# Altium PCB main board.PcbDoc
Units mil, origin at the board's own origin, x right, y up, seen from the top; angles counter-clockwise.
Board outline 2850 x 2755 mil, 2 copper layers (Top Layer, Bottom Layer); 28 components, 37 nets, 131 pads, 10 vias.
Unrouted connection lines stored in the file: 1.
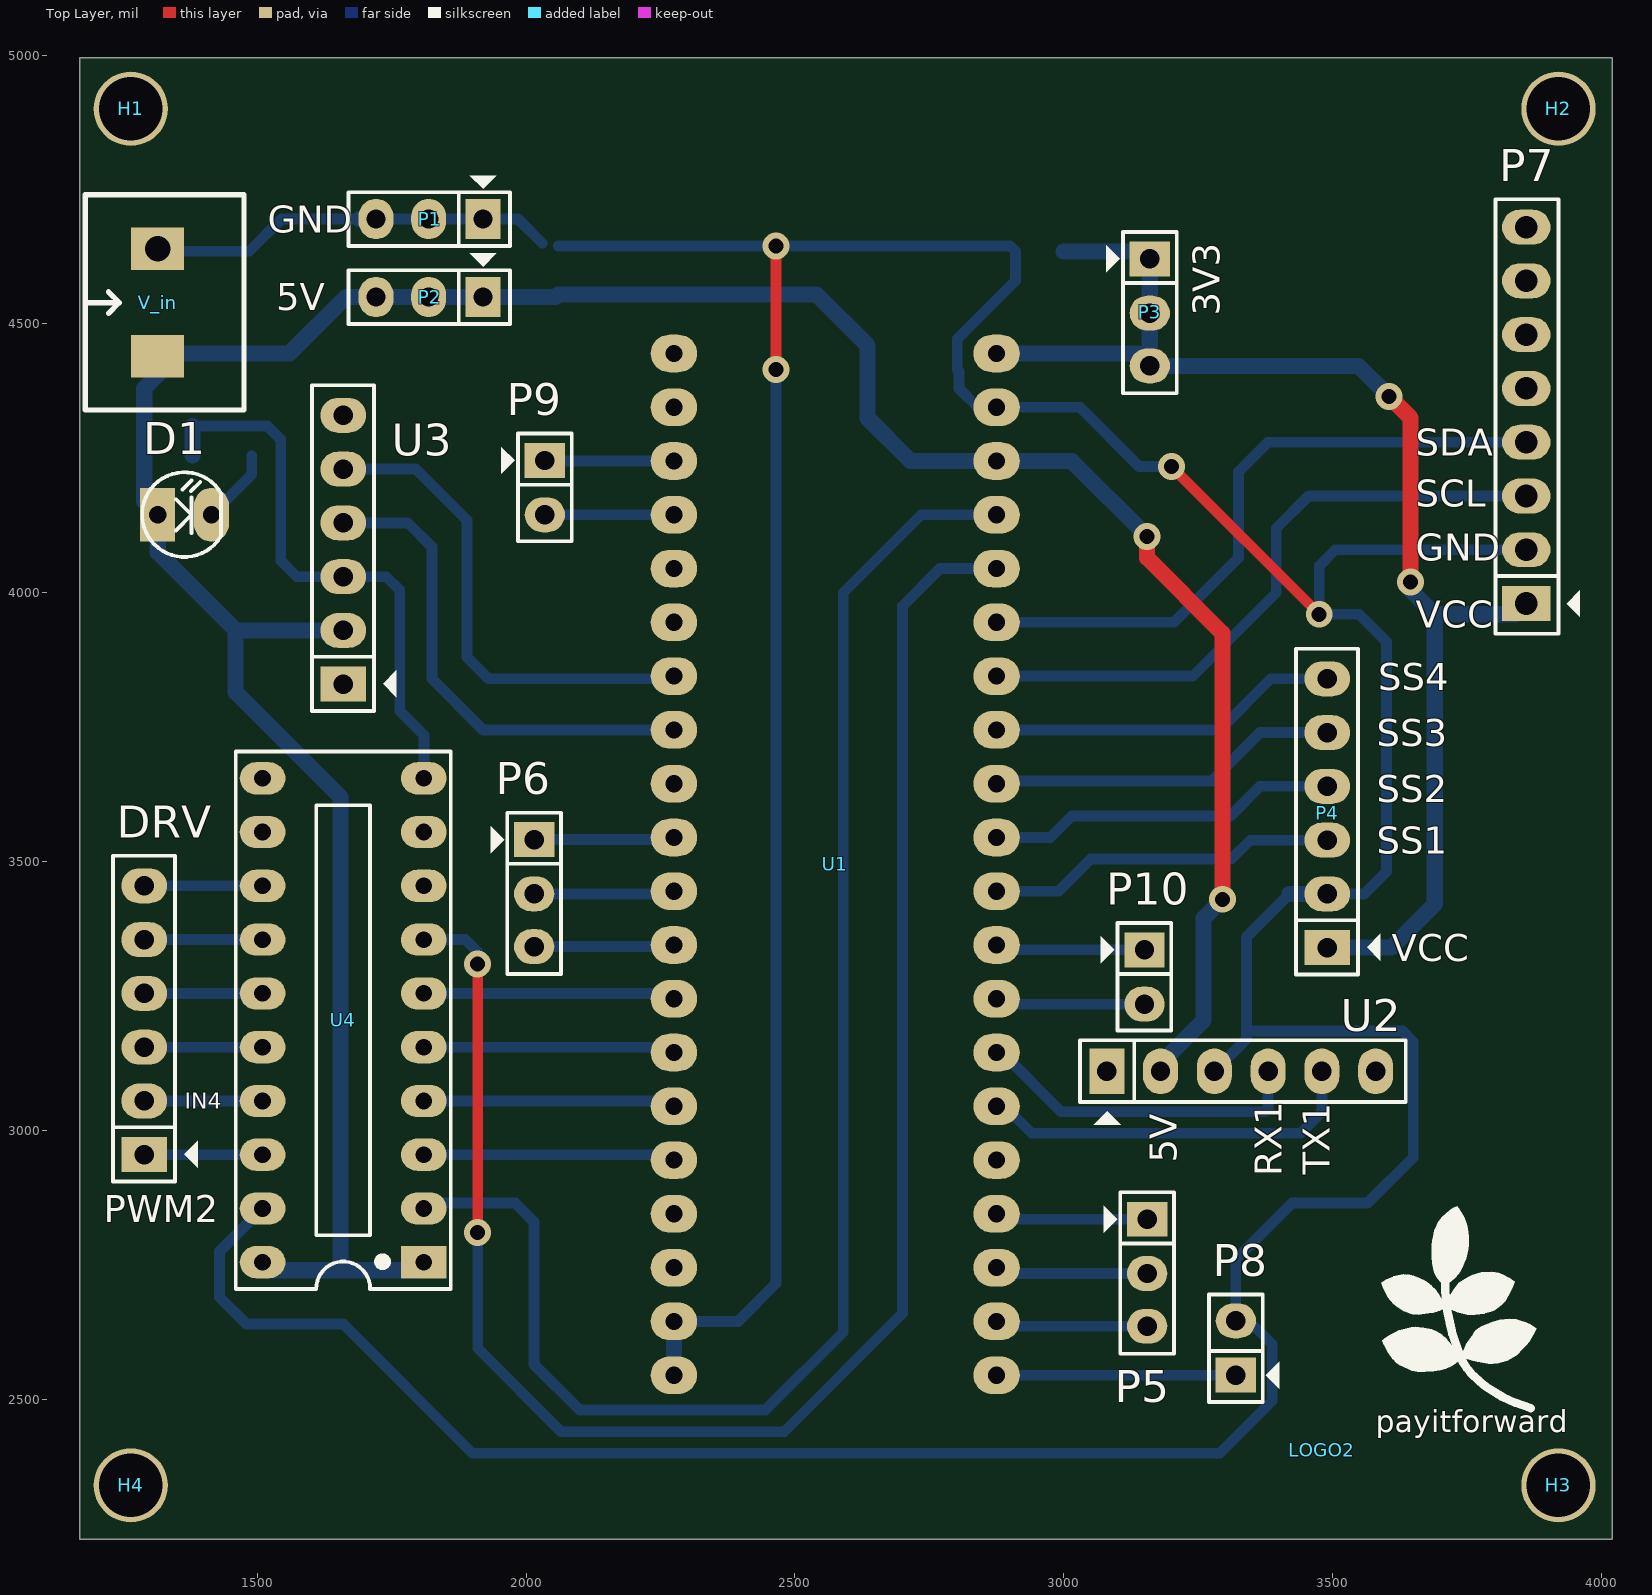
[diagram p0: Top Layer view]
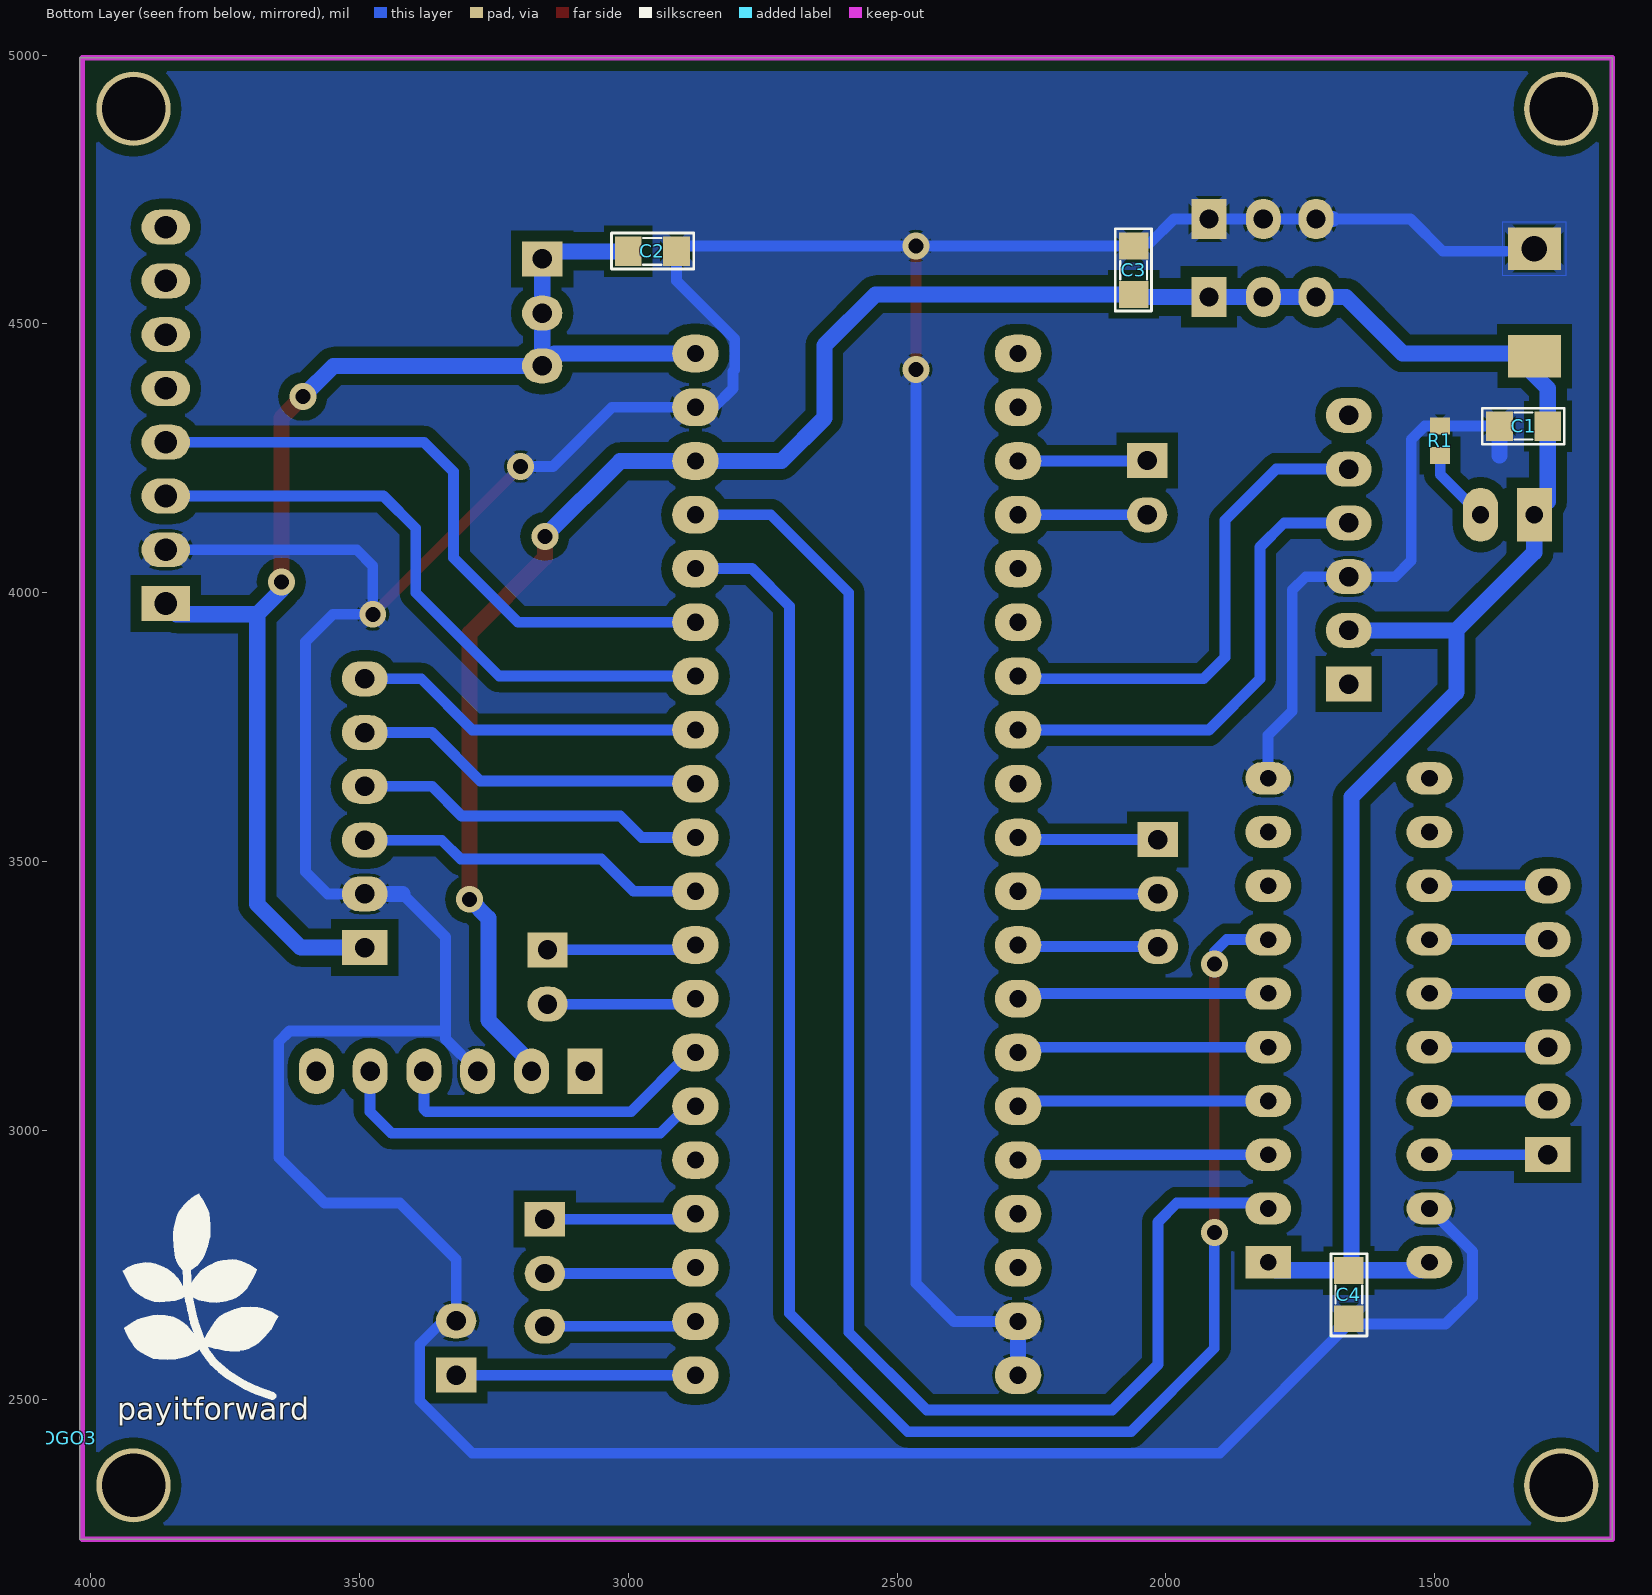
[diagram p1: Bottom Layer view, seen from below]
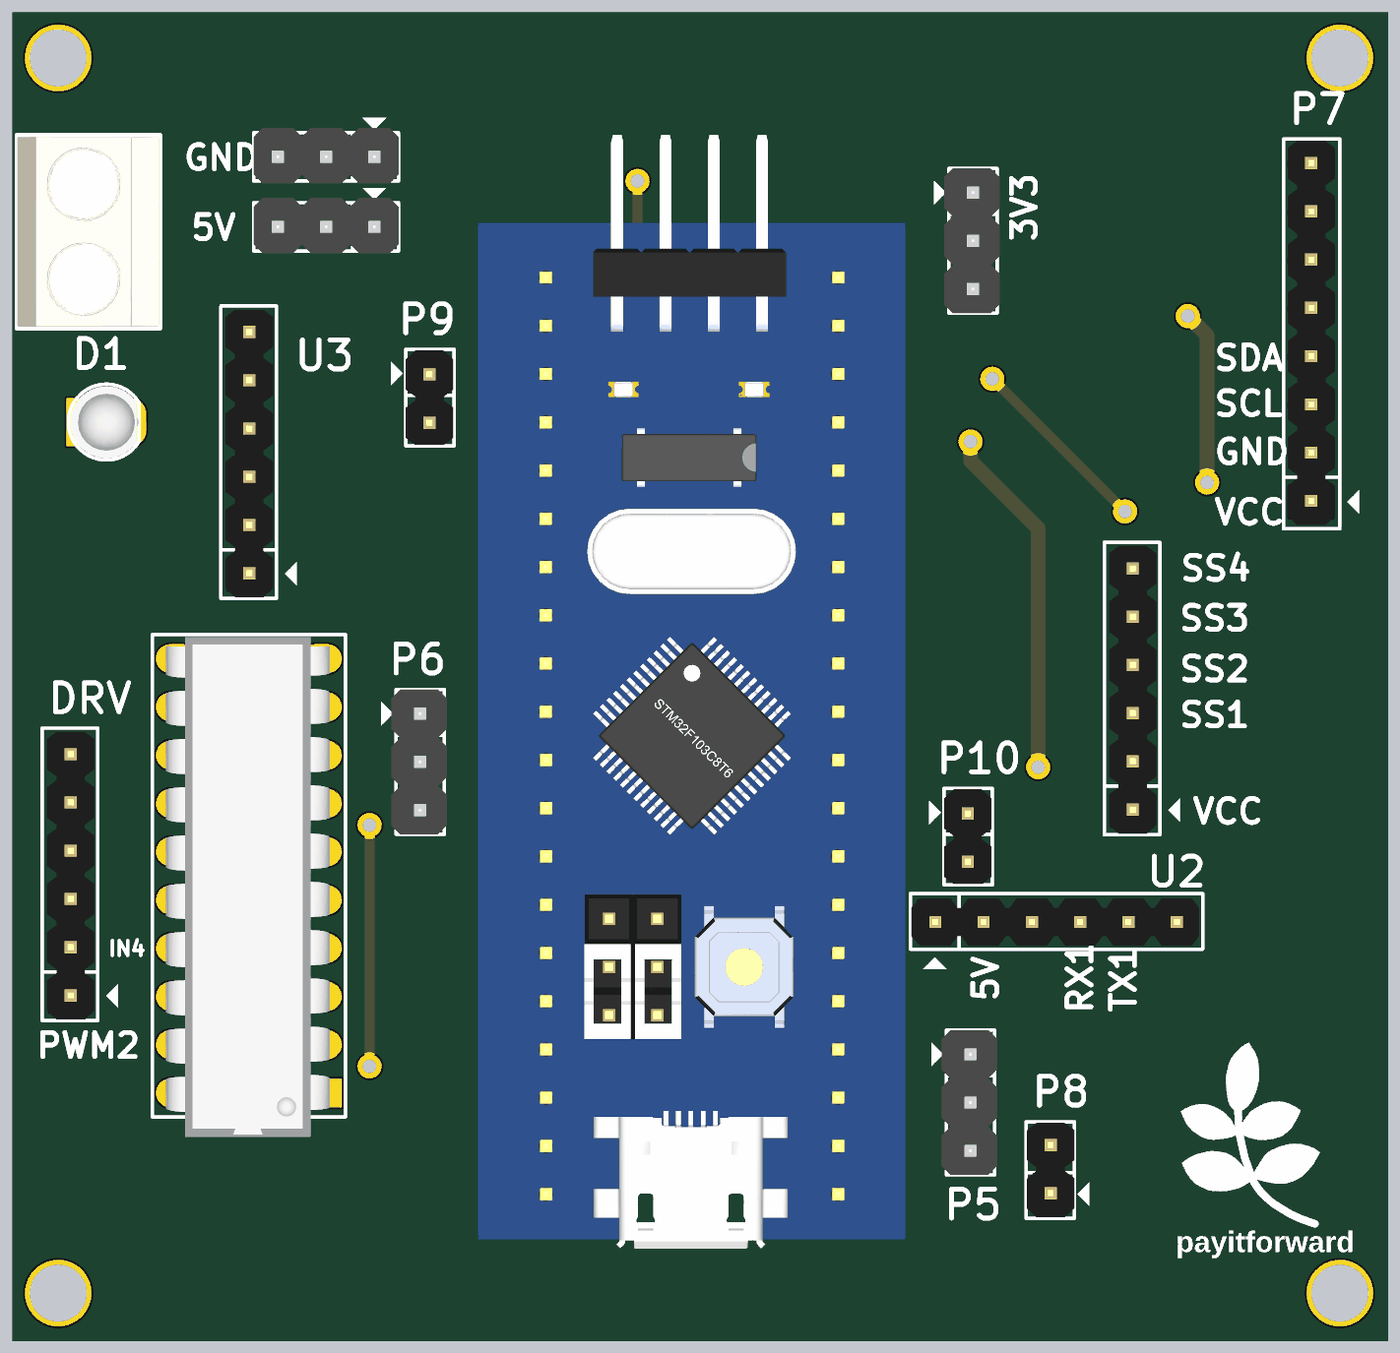
[diagram p2: 3D render of the assembled board from above, using the file's embedded part models]
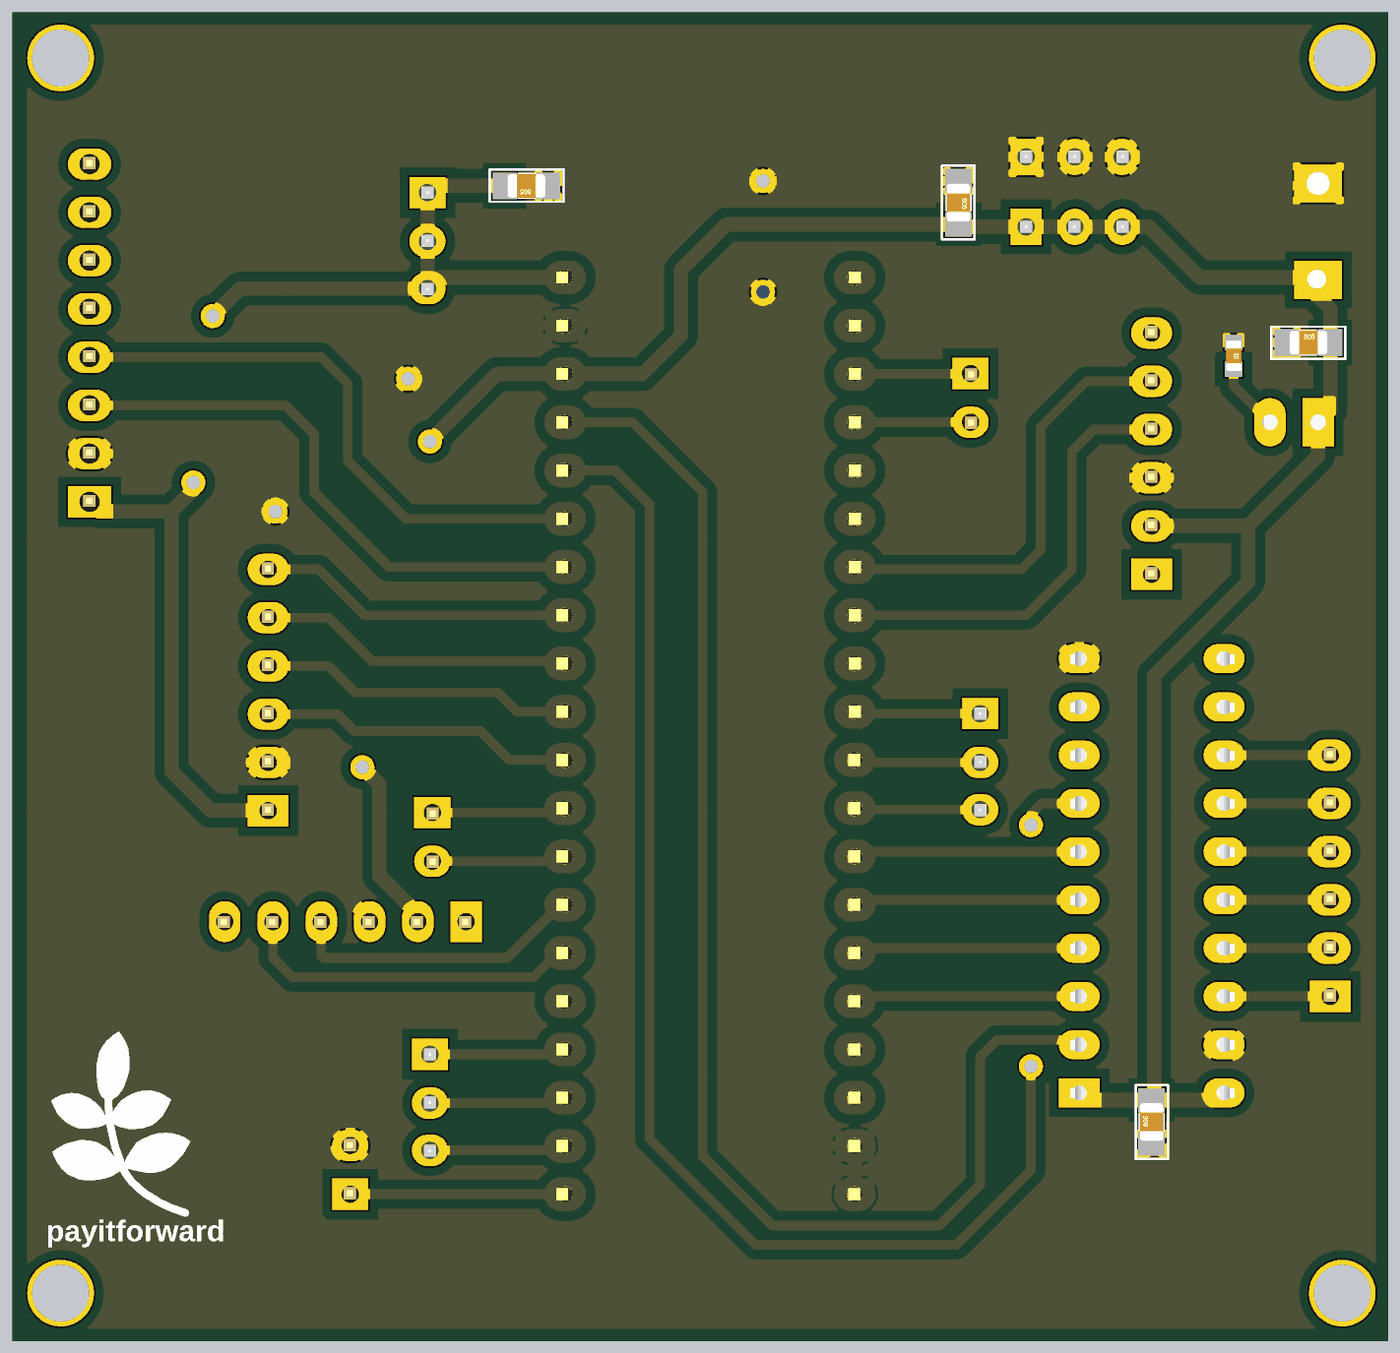
[diagram p3: 3D render of the assembled board from below, using the file's embedded part models]

## Layer stack, top to bottom
Top Solder: solder mask 0.4, Solder Resist, Dk 3.5
Top Layer: signal copper 1.4
Dielectric 1: dielectric 12.6, FR-4, Dk 4.8
Bottom Layer: signal copper 1.4
Bottom Solder: solder mask 0.4, Solder Resist, Dk 3.5

## Board outline
1170,2240 1170,4995 4020,4995 4020,2240

## Design rules (kind name [scope] priority, off if disabled: settings)
Clearance [All] p1: gap=20 ignorepadtopadclearanceinfootprint=FALSE
PolygonConnect [All] p1: connectstyle=Relief reliefconductorwidth=20 reliefentries=4 polygonreliefangle="45 Angle" airgapwidth=5
RoutingVias [All] p1: holewidth=28 width=50 viastyle="Through Hole" minholewidth=28 minwidth=50 maxholewidth=28 maxwidth=50
SolderMaskExpansion [All] p1: expansion=4
Width [All] p1: maxlimit=50 minlimit=15 preferedwidth=20 minimp=50.000000 maximp=50.000000 favimp=50.000000
30 further rules are at their usual default settings.

## Components (designator, comment, footprint, x,y, rotation, side; value= is the part's Value field where it differs from the comment)
C1 "Cap Non-Pol SMD" CAP-SM-0805 1380,4310 r180 bottom value=100pF
C2 "Cap Non-Pol SMD" CAP-SM-0805 2910,4635 r0 bottom value=100nF
C3 "Cap Non-Pol SMD" CAP-SM-0805 2060,4645 r270 bottom value=100nF
C4 "Cap Non-Pol SMD" CAP-SM-0805 1660,2650 r90 bottom value=100pF
D1 "LED" LED-3mm 1315,4145 r0 top
DRV "Header 6" JP6 1290,2955 r90 top
H1 "Hole" "LO KHOAN 3MM" 1265,4900 r0 top
H2 "Hole" "LO KHOAN 3MM" 3920,4900 r0 top
H3 "Hole" "LO KHOAN 3MM" 3920,2340 r0 top
H4 "Hole" "LO KHOAN 3MM" 1265,2340 r0 top
LOGO2 "LOGO PIF" "PIF LOGO TOP OVERLAY" 3480,2405 r0 top
LOGO3 "LOGO PIF" "PIF LOGO TOP OVERLAY" 4050,2427.71 r180 bottom (schematic designator LOGO2)
P1 "Header 3" JP3 1820,4695 r180 top
P2 "Header 3" JP3 1820,4550 r180 top
P3 "Header 3" JP3 3160,4521 r270 top
P4 "Header 6" JP6 3490,3340 r90 top
P5 "Header 3" JP3 3155,2735 r270 top
P6 "Header 3" JP3 2015,3441 r270 top
P7 "Header 8" JP8 3860,3980 r90 top
P8 "Header 2" JP2 3320,2545 r90 top
P9 "Header 2" JP2 2035,4246 r270 top
P10 "Header 2" JP2 3150,3336 r270 top
R1 "RESISTOR SMD" RES-SM-0603 1490,4309.56 r270 bottom value=1K
U1 "STM32F103 BLUEPILL" "STM32F103 Bluepill" 2275,2545 r0 top
U2 "HC 05" JP6 3080,3110 r0 top
U3 "HC 05" JP6 1660,3830 r90 top
U4 "74HC245" DIP20/W0.3 1810,2755 r90 top
V_in "Domino 2" "DOMINO 2- 5mm" 1315,4540 r90 top

## Footprints (in the part's own frame and the unit in brackets; to place one, negate y for a bottom-side part, rotate by r counter-clockwise, add the part's x,y. Pads: shape width x height; smd on the part's side, far side on the other; paste and mask are expansions set on the pad)
CAP-SM-0805 [mil]
  rect 50x55 smd: 1(0,0) 2(90,0)
  silkscreen extent -32,-34 121,33, body extent 6,-25 84,25, height 31
DIP20/W0.3 [mil] "DIP 20, 20 PIN, W 300mil, Pin to pin 100mil"
  rect 60x85 hole 31: 1(0,0)
  oval 60x85 hole 31: 2(100,0) 3(200,0) 4(300,0) 5(400,0) 6(500,0) 7(600,0) 8(700,0) 9(800,0) 10(900,0) 11(900,300) 12(800,300) 13(700,300) 14(600,300) 15(500,300) 16(400,300) 17(300,300) 18(200,300) 19(100,300) 20(0,300)
  silkscreen extent -50,-50 950,350, body extent -91,-18 945,322, height 155
"DOMINO 2- 5mm" [mm]
  rect 2x2.5 all layers, no hole: 1(-2.54,0)
  rect 2x2.5 hole 1.2: 2(2.54,0)
  silkscreen extent -5.08,-4.08 5.08,3.43, body extent -5,-4.07 5,3.43, height 10
JP2 [mil]
  rect 65x75 hole 36: 1(0,0)
  oval 65x75 hole 36: 2(101,0)
  silkscreen extent -50,-81 150,50, body extent -48,-50 148,48, height 323
JP3 [mil] "Jumper 3"
  rect 65x75 hole 36: 1(-100,0)
  oval 65x75 hole 36: 2(1,0) 3(99,0)
  silkscreen extent -150,-81 150,50, body extent -150,-60 150,55, height 355
JP6 [mil] "JP6"
  rect 65x85 hole 36: 1(0,0)
  oval 65x85 hole 36: 2(100,0) 3(200,0) 4(300,0) 5(400,0) 6(500,0)
  silkscreen extent -50,-99 556,58, body extent -48,-50 548,48, height 323
JP8 [mil] "JP8"
  rect 65x90 hole 42: 1(0,0)
  oval 65x90 hole 42: 2(100,0) 3(200,0) 4(300,0) 5(400,0) 6(500,0) 7(600,0) 8(700,0)
  silkscreen extent -56,-100 752,57, body extent -48,-50 748,48, height 323
LED-3mm [mil] "LED 2 PIN, 3ly Only colour"
  rect 65x100 hole 32: 1(0,0)
  oval 65x100 hole 32: 2(100,0)
  silkscreen extent -29,-78 118,79, body extent -25,-75 113,75, height 217
"LO KHOAN 3MM" [mil]
  round 138 hole 118.1: 1(0,0)
"PIF LOGO TOP OVERLAY" [mil]
  silkscreen extent 110,79 399,454
RES-SM-0603 [mm]
  rect 0.8x0.95 smd: 1(-0.014,0) 2(1.386,0)
  body extent -0.11,-0.4 1.49,0.4, height 0.3
"STM32F103 Bluepill" [mil]
  oval 86.61x70 hole 32: 1(0,1900) 2(0,1800) 3(0,1700) 4(0,1600) 5(0,1500) 6(0,1400) 7(0,1300) 8(0,1200) 9(0,1100) 10(0,1000) 11(0,900) 12(0,800) 13(0,700) 14(0,600) 15(0,500) 16(0,400) 17(0,300) 18(0,200) 19(0,100) 20(0,0) 21(600,0) 22(600,100) 23(600,200) 24(600,300) 25(600,400) 26(600,500) 27(600,600) 28(600,700) 29(600,800) 30(600,900) 31(600,1000) 32(600,1100) 33(600,1200) 34(600,1300) 35(600,1400) 36(600,1500) 37(600,1600) 38(600,1700) 39(600,1800) 40(600,1900)
  body extent -141,-113 745,2196, height 571

## Part data
C1 C2 C3 C4: "Capacitor"
DRV P4: "Header, 6-Pin", LatestRevisionDate=17-Jul-2002, LatestRevisionNote="Re-released for DXP Platform.", Publisher="Altium Limited"
H1 H2 H3 H4: "Hole 3mm"
LOGO2 LOGO3: library part "LOGO PIF_2"
P1 P2 P3 P5 P6: "Header, 3-Pin", LatestRevisionDate=17-Jul-2002, LatestRevisionNote="Re-released for DXP Platform.", Publisher="Altium Limited"
P7: "Header, 8-Pin", LatestRevisionDate=17-Jul-2002, LatestRevisionNote="Re-released for DXP Platform.", Publisher="Altium Limited"
P8 P9 P10: "Header, 2-Pin", LatestRevisionDate=17-Jul-2002, LatestRevisionNote="Re-released for DXP Platform.", Publisher="Altium Limited"
R1: "Resistor"
U4: "Octal bus tranceiver"
V_in: "Domino, 2-Pin", LatestRevisionDate=17-Jul-2002, LatestRevisionNote="Re-released for DXP Platform.", Publisher="Altium Limited"

## Via types
v1: diameter 50, hole 28, Top Layer to Bottom Layer, 10 vias

## Nets (pads, with @x,y where several pads share a name; then routed paths per layer and width w, separated by ;. In a path a pad name is that pad's centre, name@x,y a point inside that pad or via, vN(x,y) a via of type N, cw(c..) or ccw(c..) an arc to the next point about the centre after c; other vN are vias at no path point)
3V3: C2.2 P3.1 P3.2 P3.3 P4.1 P7.1 U1.18 U1.40 | length 2519
  Top Layer w30: v1(3605,4365) 3645,4325 v1(3645,4020)
  Bottom Layer w30: U1.40 3137,4445 P3.3 ; C2.2 3146,4635 P3.1 P3.2 P3.3 ; P4.1 3609,3340 3690,3421 3690,3960 ; v1(3605,4365) 3548,4422 P3.3 ; v1(3645,4020) 3645,4005 3690,3960 ; P7.1 3840,3960 3690,3960
5V: C1.2 C3.2 C4.2 D1.1 P2.1 P2.2 P2.3 U1.38 U2.2 U3.2 U4.1 U4.20 V_in.1 | length 5609.3
  Top Layer w30: v1(3155,4105) 3155,4065 3295,3925 v1(3295,3430)
  Bottom Layer w30: U4.20 1525,2740 C4.2 ; U3.2 1460,3930 ; U4.1 1795,2740 C4.2 ; v1(3155,4105) 3015,4245 U1.38 2715,4245 2635,4325 2635,4460 2540,4555 C3.2 2055,4550 P2.1 P2.2 P2.3 1665,4550 1560,4445 1355,4445 1290,4380 C1.2 1290,4170 D1.1 1315,4075 1460,3930 ; U2.2 3180,3125 3260,3205 3260,3395 v1(3295,3430) ; 1460,3930 1460,3815 1655,3620 1655,2745 C4.2
ADC5: P6.1 U1.10 | length 261.7
  Bottom Layer w20: P6.1 2271,3541 U1.10
ADC6: P6.2 U1.11 | length 262.1
  Bottom Layer w20: P6.2 2270,3440 U1.11
ADC7: P6.3 U1.12 | length 261.2
  Bottom Layer w20: P6.3 2272,3342 U1.12
GND: C1.1 C2.1 C3.1 C4.1 P1.1 P1.2 P1.3 P4.2 P7.2 P8.2 R1.1 U1.19 U1.20 U1.39 U2.3 U3.3 U4.10 U4.19 V_in.2 | length 11230
  Top Layer w20: v1(2465,4415) v1(2465,4645) ; v1(3200,4235) v1(3475,3960)
  Bottom Layer w20: 1367.48,4635 1485,4635 1545,4695 P1.3@1690,4695 ; C1.1 1489.88,4310 R1.1 1518.83,4310.12 1543.7,4285.25 1543.7,4059.87 1573.57,4030 U3.3 1740,4030 1765,4005 1765,3780 1810,3735 U4.10 ; U4.19 1430,2775 1430,2690 1480,2640 1660,2640 1900,2400 3289.93,2400 3387.5,2497.57 3387.5,2602.5 3344,2646 P8.2 3320,2760 3425,2865 3565,2865 3650,2950 3650,3165 3630,3185 3340,3185 ; P1.3 P1.2 P1.1 1985,4695 2030,4650 ; C3.1 v1(2465,4645) 2900,4645 C2.1 2910,4580.23 2801.69,4471.92 2801.69,4414.77 2805,4411.46 2805,4380 2840,4345 U1.39 3030,4345 3140,4235 v1(3200,4235) ; U1.19 2394,2645 2465,2716 v1(2465,4415) ; U2.3 3340,3170 3340,3185 ; 3420,3440 3340,3360 3340,3185 ; P4.2 3559,3440 3600,3481 3600,3909 3549,3960 v1(3475,3960) 3475,4050 3505,4080 P7.2
  Bottom Layer w30: 1380,4255 C1.1 ; P1.3@1690,4695 P1.3 ; U1.20 U1.19 ; 3420,3440 P4.2
GPIO1: P9.1 U1.3 | length 240.4
  Bottom Layer w20: P9.1 2036,4245 U1.3
GPIO2: P9.2 U1.4 | length 240
  Bottom Layer w20: P9.2 U1.4
GPIO3: P10.1 U1.29 | length 278.7
  Bottom Layer w20: U1.29 2884,3336 P10.1
GPIO4: P10.2 U1.28 | length 279.1
  Bottom Layer w20: U1.28 2885,3235 P10.2
GPIO5: P8.1 U1.21 | length 450.7
  Bottom Layer w20: U1.21@2879,2549 U1.21 P8.1
IN1: U1.16 U4.3 | length 469.1
  Bottom Layer w20: U4.3 2265,2955 U1.16
IN2: U1.15 U4.4 | length 469.1
  Bottom Layer w20: U4.4 2265,3055 U1.15
IN3: U1.14 U4.5 | length 469.1
  Bottom Layer w20: U4.5 2265,3155 U1.14
IN4: U1.13 U4.6 | length 469.1
  Bottom Layer w20: U4.6 2265,3255 U1.13
IS1: P4.3 U1.30 | length 654.4
  Bottom Layer w20: U1.30 2990,3445 3050,3505 3311.57,3505 3346.57,3540 P4.3
IS2: P4.4 U1.31 | length 654.4
  Bottom Layer w20: U1.31 2975,3545 3015,3585 3310,3585 3365,3640 P4.4
IS3: P4.5 U1.32 | length 654.4
  Bottom Layer w20: U1.32 2880,3650 3275,3650 3365,3740 P4.5
IS4: P4.6 U1.33 | length 654.4
  Bottom Layer w20: U1.33 3290,3745 3385,3840 P4.6
MCU_RX1: U1.27 U2.4 | length 622.7
  Bottom Layer w20: U1.27 2885,3145 2995,3035 3375.1,3035 3380,3039.9 U2.4
MCU_RX2: U1.8 U3.4 | length 918
  Bottom Layer w20: U3.4 1780,4130 1825,4085 1825,3840 1920,3745 U1.8
MCU_TX1: U1.26 U2.5 | length 717.3
  Bottom Layer w20: U1.26 2890.23,3045 2940.23,2995 3440,2995 3480,3035 U2.5
MCU_TX2: U1.7 U3.5 | length 928
  Bottom Layer w20: U3.5 1795,4230 1890,4135 1890,3880 1930,3840 2270,3840 U1.7
NetD1_2: D1.2 R1.2 | length 141.1
  Bottom Layer w20: D1.2 1490,4220 R1.2
NetDRV_1: DRV.1 U4.18 | length 235
  Bottom Layer w20: DRV.1@1275,2955 U4.18
NetDRV_2: DRV.2 U4.17 | length 235
  Bottom Layer w20: DRV.2@1275,3055 U4.17
NetDRV_3: DRV.3 U4.16 | length 235
  Bottom Layer w20: DRV.3@1275,3155 U4.16
NetDRV_4: DRV.4 U4.15 | length 235
  Bottom Layer w20: DRV.4@1275,3255 U4.15
NetDRV_5: DRV.5 U4.14 | length 235
  Bottom Layer w20: DRV.5@1275,3355 U4.14
NetDRV_6: DRV.6 U4.13 | length 235
  Bottom Layer w20: DRV.6@1275,3455 U4.13
PWM1: U1.36 U4.7 | length 3325.9
  Top Layer w20: v1(1910,2810) v1(1910,3310)
  Bottom Layer w20: U4.7 1887,3355 1910,3332 v1(1910,3310) v1@1910,3295 ; v1(1910,2810) 1910,2595 2065,2440 2480,2440 2700,2660 2700,3975 2770,4045 U1.36
PWM2: U1.37 U4.2 | length 2879
  Bottom Layer w20: U4.2 1820,2865 1980,2865 2015,2830 2015,2565 2100,2480 2445,2480 2590,2625 2590,4000 2735,4145 U1.37
SCL: P7.3 U1.34 | length 1194.1
  Bottom Layer w20: U1.34 3240,3845 3395,4000 3395,4120 3455,4180 P7.3
SDA: P7.4 U1.35 | length 1217.5
  Bottom Layer w20: U1.35 3205,3945 3325,4065 3325,4225 3380,4280 P7.4
SPI2_MISO: P5.2 U1.23 | length 284.6
  Bottom Layer w20: U1.23 2886,2734 P5.2
SPI2_MOSI: P5.1 U1.24 | length 284.1
  Bottom Layer w20: U1.24 2885,2835 P5.1
SPI2_SCK: P5.3 U1.22 | length 283.7
  Bottom Layer w20: U1.22 2884,2636 P5.3
pads on no net: H1.1 H2.1 H3.1 H4.1 P7.5 P7.6 P7.7 P7.8 U1.1 U1.2 U1.5 U1.6 U1.9 U1.17 U1.25 U2.1 U2.6 U3.1 U3.6 U4.8 U4.9 U4.11 U4.12

## Polygon pours and split planes (outlines as drawn)
GND on Bottom Layer (solid, remove dead copper, pour order 64): 1170,4995 1170,2240 4015,2240 4015,4995 4350,4995 4495,5140
GND on Bottom Layer "Bottom Layer-GND 5" (solid, remove dead copper, pour order 62): 1605,4050
GND on Bottom Layer "Bottom Layer-GND 7" (solid, remove dead copper, pour order 58): 1170,4980
GND on Bottom Layer "Bottom Layer-GND 6" (solid, remove dead copper, pour order 54): 980,3070
GND on Bottom Layer "Bottom Layer-GND" (solid, remove dead copper, pour order 36): 1170,4985
GND on Bottom Layer "Bottom Layer-GND 1" (solid, remove dead copper, pour order 32): 1255.79,4689.37 1374.21,4689.37 1374.21,4590.63 1255.79,4590.63
GND on Bottom Layer "Bottom Layer-GND 2" (solid, remove dead copper, pour order 26): 1170,4985
GND on Bottom Layer "Bottom Layer-GND 3" (solid, remove dead copper, pour order 24): 625,2970
GND on Bottom Layer "Bottom Layer-GND 4" (solid, pour order 14): 14660,3310

## Keep-outs
Bottom Layer:
  lines w10: 1170,2240 4015,2240 4015,4995 1170,4995 1170,2240

## Other copper
Bottom Layer:
  region: 3785,2890
  pour cut-out: 3764.61,2401.33
  pour cut-out: 3575,2860
  pour cut-out: 3730,2805

## Silkscreen, mask and mechanical layers (free items; w line width, h text height)
Top Overlay:
  text "GND" at 1520,4670 h50
  text "5V" at 1535,4525 h50
  text "3V3" at 3290,4515 h50 r90
  text "SDA" at 3655,4255 h50
  text "SCL" at 3655,4160 h50
  text "GND" at 3655,4060 h50
  text "VCC" at 3654.7,3935 h50
  text "SS4" at 3585,3818.8 h50
  text "SS3" at 3582.31,3715 h50
  text "SS2" at 3582.31,3610 h50
  text "SS1" at 3582.31,3515 h50
  text "VCC" at 3610,3315 h50
  text "IN4" at 1365,3040 h30
  text "5V" at 3210,2940 h50 r90
  text "TX1" at 3495,2917.26 h50 r90
  text "RX1" at 3405,2915 h50 r90
  text "PWM2" at 1215,2829.78 h50

## Text inside footprints (layer, text, board x,y; h text height)
LOGO2: Top Overlay "payitforward" at 3580,2425 h70
LOGO3: Bottom Overlay "payitforward" at 3950,2447.71 h70